# Altium PCB Shape_Test.PcbDoc
Units mil, origin at the board's own origin, x right, y up, seen from the top; angles counter-clockwise.
Board outline 1974.28 x 1186.13 mil, 2 copper layers (Top Layer, Bottom Layer), stack 50.044 mil thick; 6 components, 14 nets, 65 pads, 0 vias.
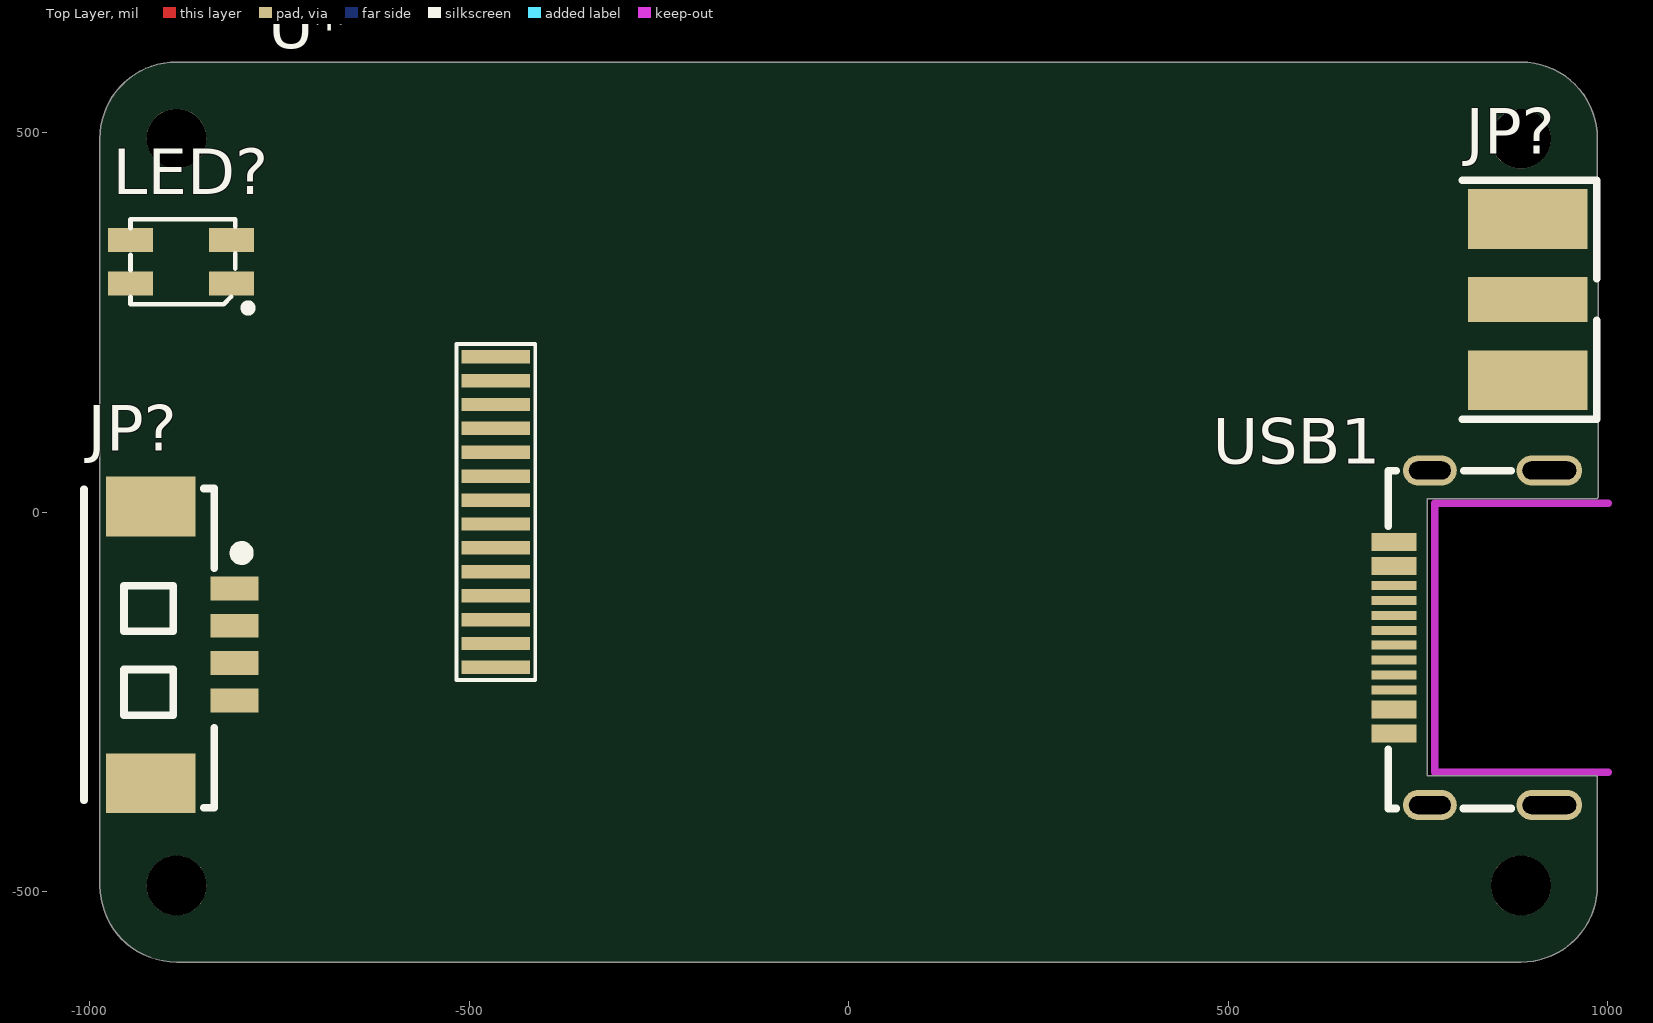
[diagram p0: Top Layer view]
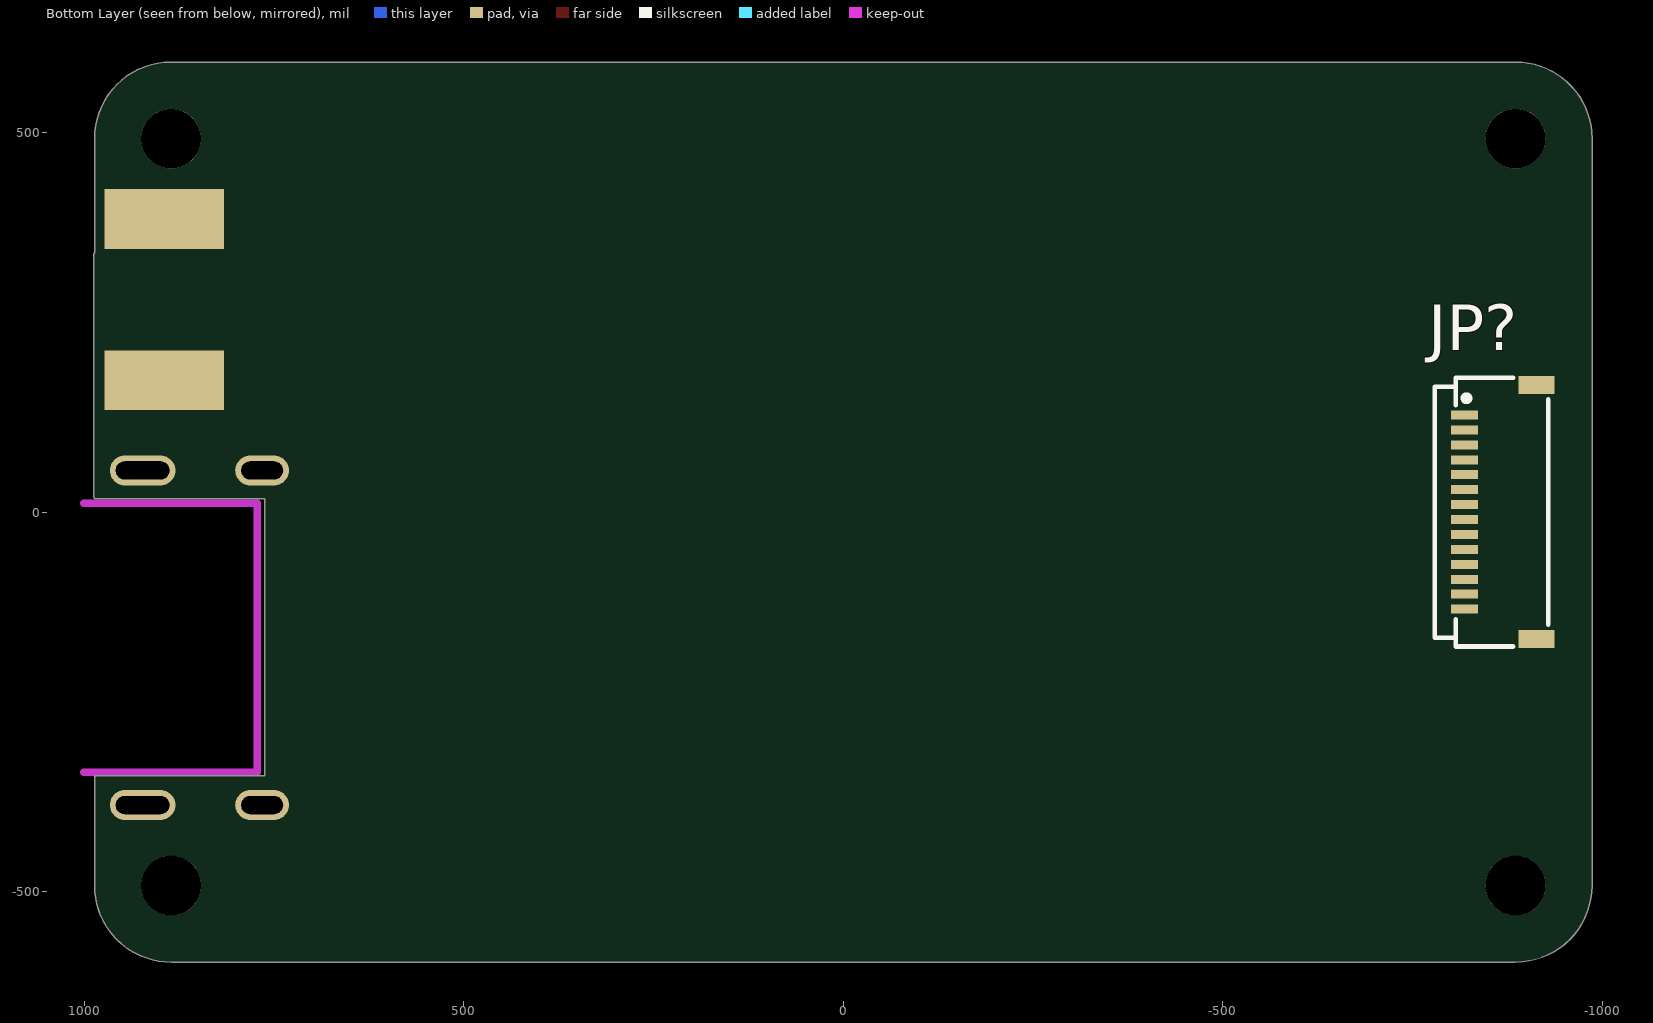
[diagram p1: Bottom Layer view, seen from below]

## Layer stack, top to bottom
Top Solder: solder mask 6.474, Solder Resist, Dk 3.5
Top Layer: signal copper 1.4
Dielectric 1: dielectric 47.2441, FR-4, Dk 4.8
Bottom Layer: signal copper 1.4
Bottom Solder: solder mask 6.474, Solder Resist, Dk 3.5

## Board outline
-986.77,-492.13 ccw(c-885.83,-492.13) -885.83,-593.07 885.83,-593.07 ccw(c885.83,-492.13) 986.77,-492.13 986.77,-350 ccw(c984.25,-350) 984.25,-347.49 762.52,-347.49 762.52,17.49 985,17.49 ccw(c985,20) 987.52,20 987.52,340 ccw(c985,340) 986.77,341.79 986.77,492.13 ccw(c885.83,492.13) 885.83,593.07 -885.83,593.07 ccw(c-885.83,492.13) -986.77,492.13 ccw(c-984.25,492.13) -986.77,492.1

## Design rules (kind name [scope] priority, off if disabled: settings)
Clearance [All] p1: gap=10 ignorepadtopadclearanceinfootprint=TRUE except(0: Arc-Hole Track-Hole SMDPad-Hole THPad-Hole Via-Hole Fill-Hole Poly-Hole Region-Hole Text-Hole)
PolygonConnect [All] p1: connectstyle=Relief reliefconductorwidth=10 reliefentries=4 polygonreliefangle="90 Angle" airgapwidth=10
RoutingVias [All] p1: holewidth=28 width=50 viastyle="Through Hole" minholewidth=28 minwidth=50 maxholewidth=28 maxwidth=50
SolderMaskExpansion [All] p1: expansion=4
Width [All] p1: maxlimit=10 minlimit=10 preferedwidth=10
30 further rules are at their usual default settings.

## Classes and differential pairs
component class Shape_Test: JP? LED? U* USB1

## Components (designator, comment, footprint, x,y, rotation, side; value= is the part's Value field where it differs from the comment)
JP? "SMA WIFI 天线接口" SMA-KE 895,280 r270 top
JP? "FH34SRJ-14S-0.5SH(50)" FH34SRJ-14S-0.5SH(50) -866.14,0 r90 bottom
JP? "HDR-1X4" "MX 1.25-WS-4P" -920,-175 r270 top
LED? "RGB-3528" "LED 3528-4Pin" -880,330 r180 top
U* "SPI-1.44-14" FPC-0.8-14P -465,0 r90 top
USB1 "TYPE-C 16P CB1.6" "TYPE-C  16PIN" 800,-216.54 r90 top

## Footprints (in the part's own frame and the unit in brackets; to place one, negate y for a bottom-side part, rotate by r counter-clockwise, add the part's x,y. Pads: shape width x height; smd on the part's side, far side on the other; paste and mask are expansions set on the pad)
FH34SRJ-14S-0.5SH(50) [mm]
  rect 0.3x0.9 smd: 1(3.25,1.2) 2(2.75,1.2) 3(2.25,1.2) 4(1.75,1.2) 5(1.25,1.2) 6(0.75,1.2) 7(0.25,1.2) 8(-0.25,1.2) 9(-0.75,1.2) 10(-1.25,1.2) 11(-1.75,1.2) 12(-2.25,1.2) 13(-2.75,1.2) 14(-3.25,1.2)
  rect 0.6x1.2 smd: 15(-4.25,-1.2) 16(4.25,-1.2)
  silkscreen extent -4.5,-1.6 4.5,2.2, body extent -4.47,-1.75 4.53,2.05, height 0.98
FPC-0.8-14P [mm]
  rect 0.45x2.3 smd: 1(-5.2,0) 2(-4.4,0) 3(-3.6,0) 4(-2.8,0) 5(-2,0) 6(-1.2,0) 7(-0.4,0) 8(0.4,0) 9(1.2,0) 10(2,0) 11(2.8,0) 12(3.6,0) 13(4.4,0) 14(5.2,0)
  silkscreen extent -5.63,-1.32 5.63,1.32, body extent -14.75,-28.63 14.75,7.87, height 2.3
"LED 3528-4Pin" [mm] "4脚，3528LED"
  rect 1.5x0.8 smd: 1(-1.689,0.725) 2(-1.689,-0.725) 3(1.689,-0.725) 4(1.689,0.725)
  silkscreen extent -2.37,-1.42 1.69,1.68, body extent -1.75,-1.4 1.75,1.4, height 1.95
"MX 1.25-WS-4P" [mm] "长：10.15mm，宽：4.2mm，高：3.4mm"
  rect 2x3 smd: 0(-4.632,0) 0(4.632,0)
  rect 0.8x1.6 smd: 1(-1.889,2.811) 2(-0.639,2.811) 3(0.611,2.811) 4(1.861,2.811)
  silkscreen extent -5.23,-2.23 5.45,3.25, body extent -5.07,-2.1 5.08,3.09, height 3.4
SMA-KE [mm] "SMA 偏脚射频天线座     淘宝ID:黄晶宝石"
  rect 1.5x4 smd: 1(0,0)
  rect 2x4 smd: 2(-2.7,0) 2(2.7,0)
  rect 2x4 smd far side: 3(-2.7,0) 3(2.7,0)
  silkscreen extent -4,-2.2 4,2.3, body extent -3.25,-1.33 3.25,12.17, height 3.75
"TYPE-C  16PIN" [mm]
  oval 1x1.8 hole 0.6 slot 1.4 at 90 deg: 13(6.893,0.866) 16(-4.307,0.866)
  oval 1x2.2 hole 0.6 slot 1.8 at 90 deg: 14(6.893,-3.133) 15(-4.307,-3.133)
  rect 0.6x1.5 smd: A1B12(-1.907,2.067) A4B9(-1.107,2.067) B1A12(4.493,2.067) B4A9(3.693,2.067)
  rect 0.3x1.5 smd: A5(0.043,2.067) A6(1.043,2.067) A7(1.543,2.067) A8(2.543,2.067) B5(3.043,2.067) B6(2.043,2.067) B7(0.543,2.067) B8(-0.457,2.067)
  Keep-Out Layer lines w0.254: -3.207,-5.094 -3.207,0.706 5.793,0.706 5.793,-5.094
  silkscreen extent -4.42,-1.86 6.88,2.26, body extent -4.47,-5.19 7.07,2.01, height 2.16

## Part data
JP?: library part SMA, "SMA-2.4G射频天线接口"
JP?: "C324724"
JP?: library part "Header 4", "4P接插件"
LED?: library part "LED-RGB 3528", "3528三基色LED", BOM名称=三基色LED, 封装库来自淘宝卖家 ID：黄晶宝石=ÆäËûµêÆÌ¹ºÈë¾ùÎªµÁ°æ£¬²»ÏíÊÜÊÛºó¼
USB1: "沉板1.6", BOM_JLCPCB Part Class="Extended Part", BOM_Manufacturer="SHOU HAN(首韩)", BOM_Manufacturer Part="TYPE-C 16P CB1.6", BOM_Supplier=LCSC, BOM_Supplier Part=C2681554, Contributor=LCSC, spicePre=U, spiceSymbolName="TYPE-C 16P CB1.6"

## Free pads (board coordinates)
  round 78.74 hole 78.74 unplated: 0(-885.83,492.13) 0(-885.83,-492.13) 0(885.83,492.13) 0(885.83,-492.13)

## Nets (pads, with @x,y where several pads share a name; then routed paths per layer and width w, separated by ;. In a path a pad name is that pad's centre, name@x,y a point inside that pad or via, vN(x,y) a via of type N, cw(c..) or ccw(c..) an arc to the next point about the centre after c; other vN are vias at no path point)
3V3: JP?.13
+5: JP?.1@-818.9,127.95
CHIP_EN: JP?.10
GND: JP?.14
LCD_BLK: JP?.2@-818.9,108.27
LCD_DC: JP?.6
LCD_MOSI: JP?.4@-818.9,68.9
LCD_RES: JP?.3@-818.9,88.58
LCD_SCK: JP?.5
SPI_CS: JP?.7
SWCLK: JP?.11
SWDIO: JP?.12
USART_RX: JP?.8
USART_TX: JP?.9
pads on no net: JP?.0 JP?.1@895,280 JP?.1@-809.35,-100.64 JP?.2@895,173.7 JP?.2@895,386.3 JP?.2@-809.35,-149.85 JP?.3@895,173.7 JP?.3@895,386.3 JP?.3@-809.35,-199.06 JP?.4@-809.35,-248.28 JP?.15 JP?.16 LED?.1 LED?.2 LED?.3 LED?.4 U*.1 U*.2 U*.3 U*.4 U*.5 U*.6 U*.7 U*.8 U*.9 U*.10 U*.11 U*.12 U*.13 U*.14 USB1.13 USB1.14 USB1.15 USB1.16 USB1.A1B12 USB1.A4B9 USB1.A5 USB1.A6 USB1.A7 USB1.A8 USB1.B1A12 USB1.B4A9 USB1.B5 USB1.B6 USB1.B7 USB1.B8

## Silkscreen, mask and mechanical layers (free items; w line width, h text height)
Mechanical 1:
  lines w5: 984.25,340 985,340 ; 984.25,340 985,340 ; 984.25,340 984.25,492.13 ccw(c885.83,492.13) 885.83,590.55 -885.83,590.55 ccw(c-885.83,492.13) -984.25,492.13 -984.25,-492.13 ccw(c-885.83,-492.13) -885.83,-590.55 885.83,-590.55 ccw(c885.83,-492.13) 984.25,-492.13 984.25,-350 760,-350 760,20 985,20 985,340